# Altium PCB USB test.PcbDoc
Units mil, origin at the board's own origin, x right, y up, seen from the top; angles counter-clockwise.
Board outline 6000 x 4000 mil, 2 copper layers (Top Layer, Bottom Layer); 7 components, 8 nets, 37 pads, 5 vias.
Unrouted connection lines stored in the file: 2.
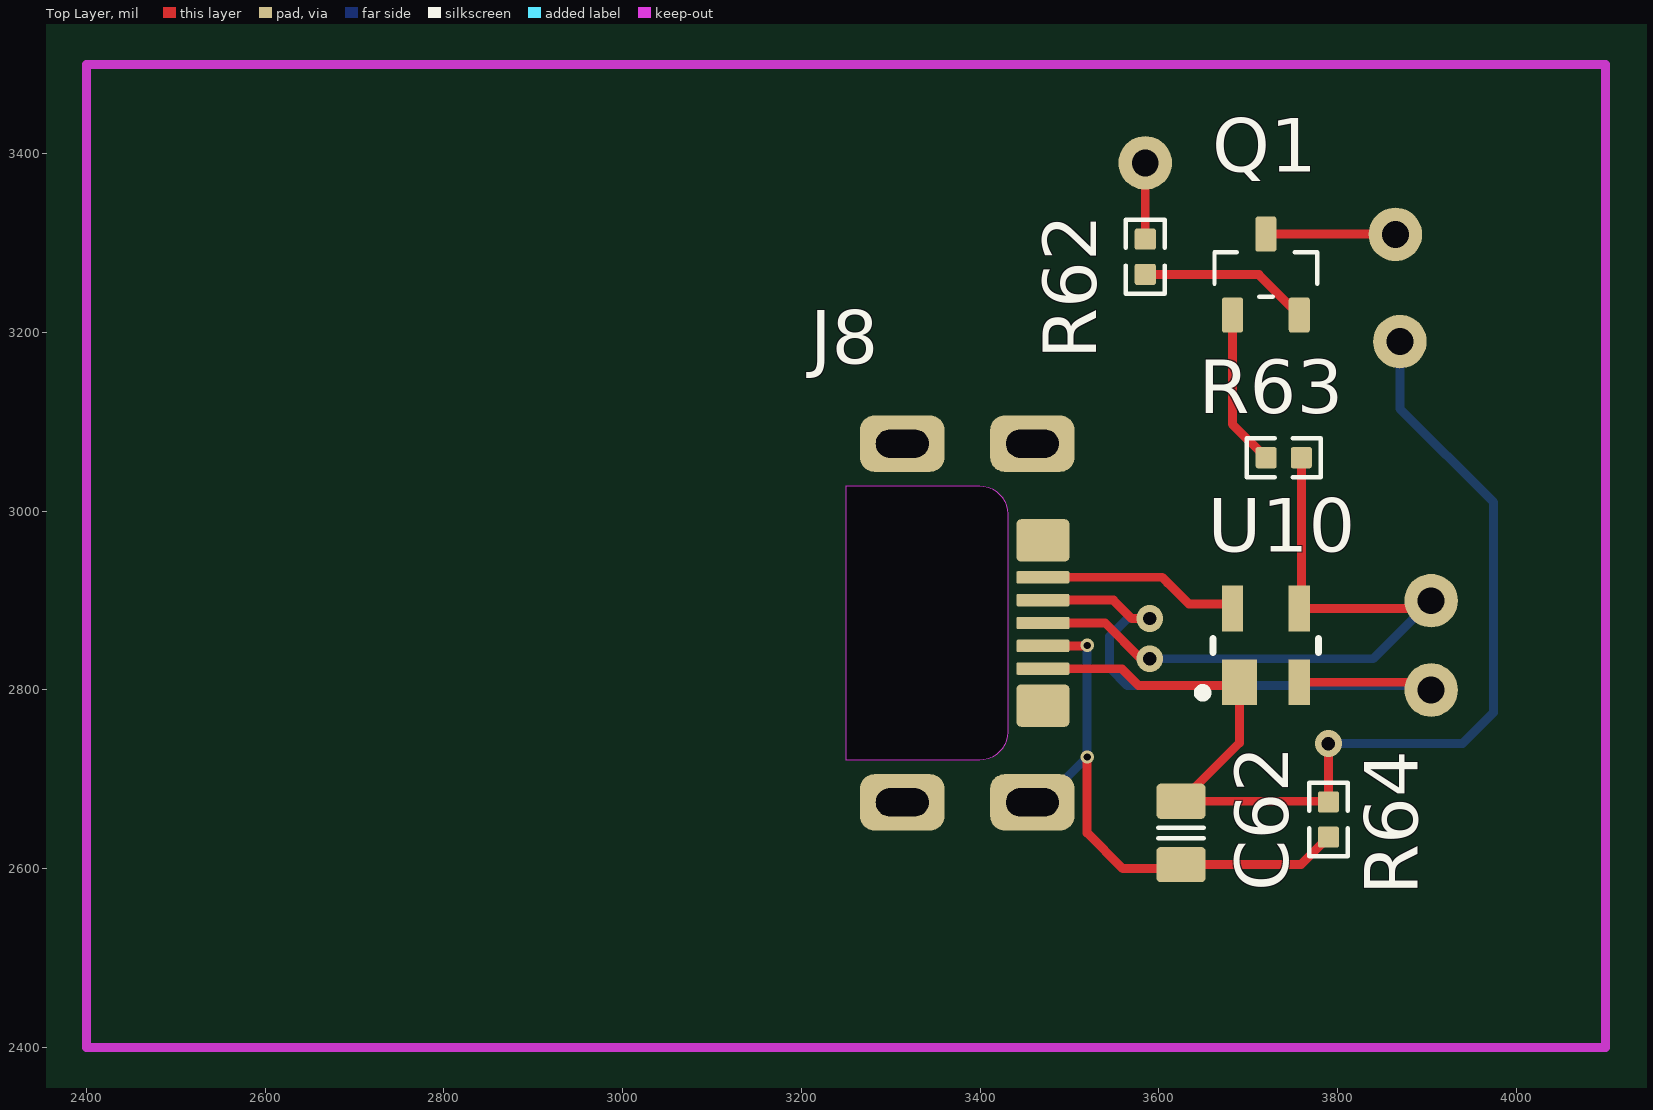
[diagram p0: Top Layer view]
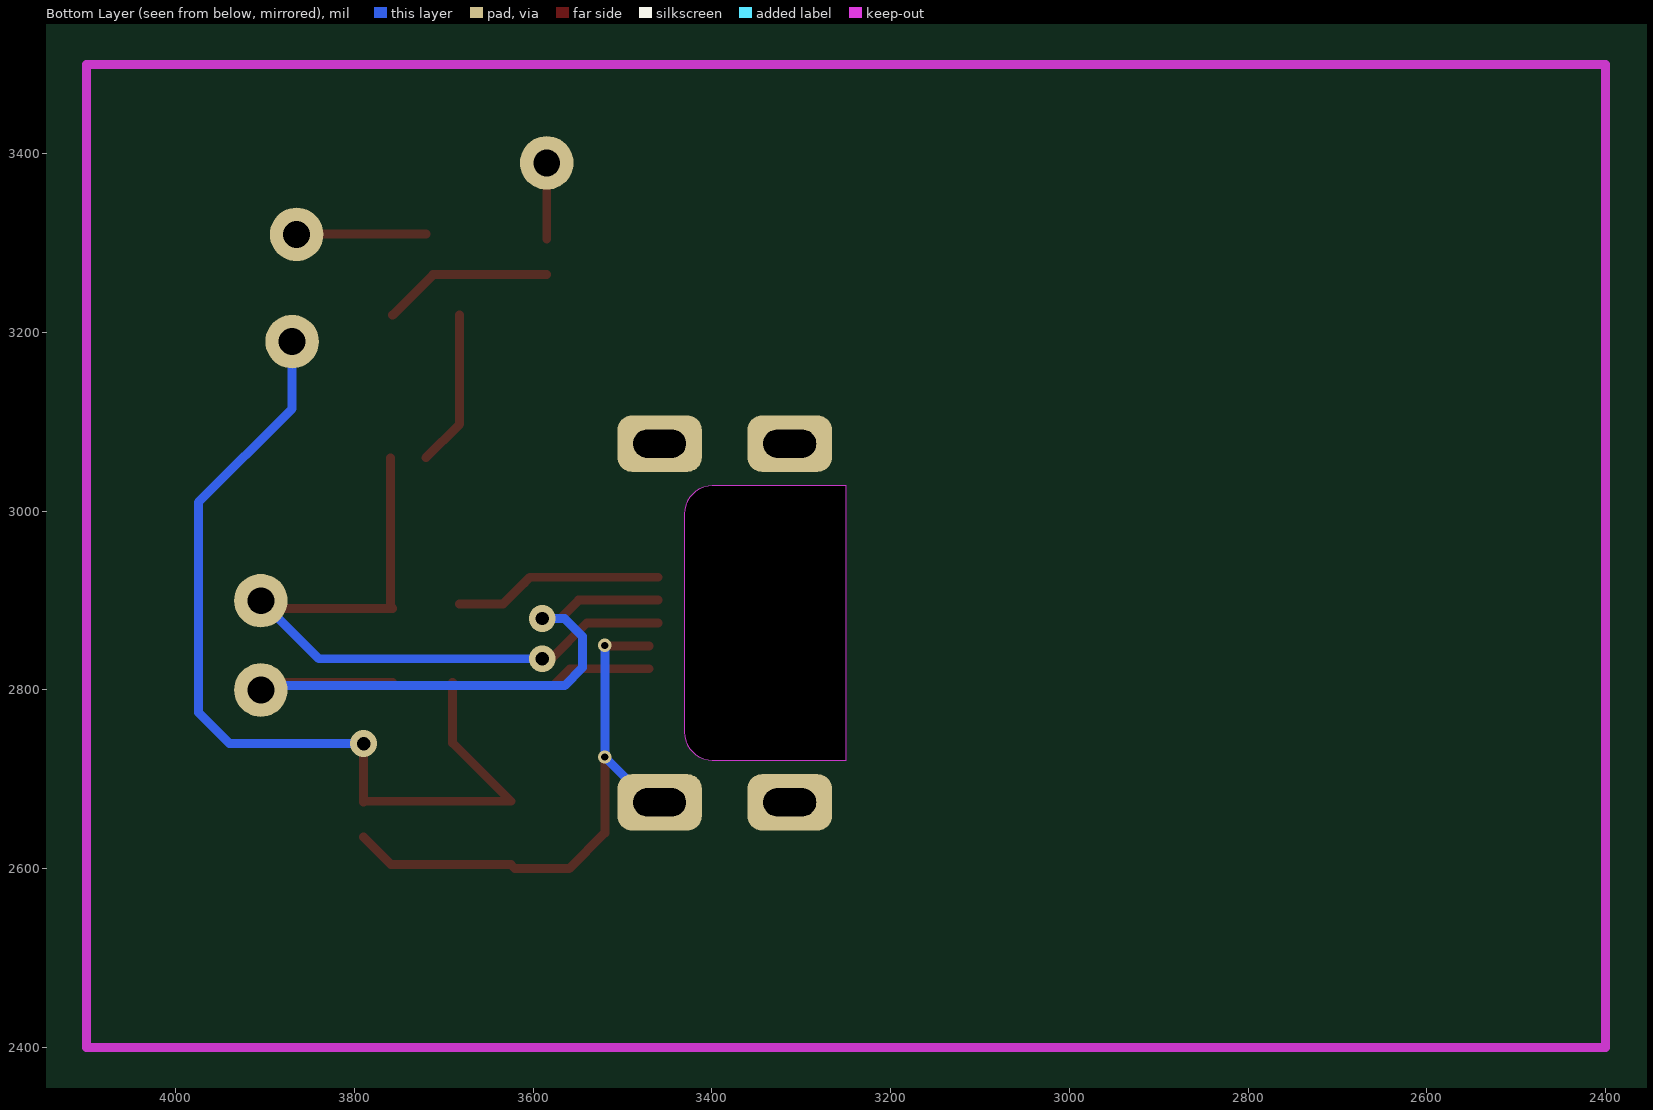
[diagram p1: Bottom Layer view, seen from below]
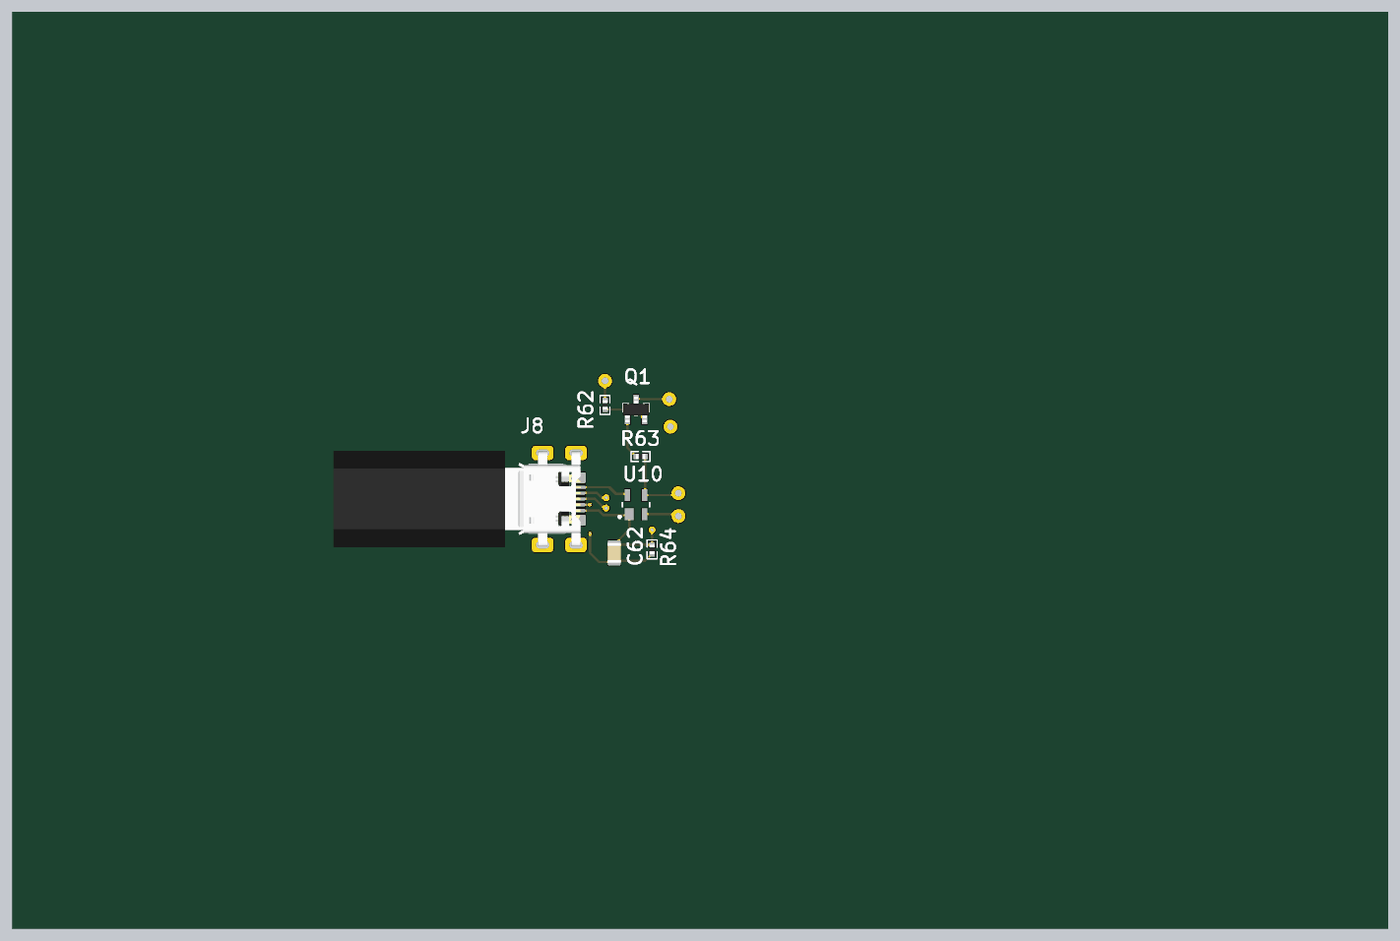
[diagram p2: 3D render of the assembled board from above, using the file's embedded part models]

## Layer stack, top to bottom
Top Layer: signal copper 1.4
Dielectric: dielectric 12.6, FR-4, Dk 4.8
Bottom Layer: signal copper 1.4

## Board outline
1000,1000 7000,1000 7000,5000 1000,5000

## Design rules (kind name [scope] priority, off if disabled: settings)
Clearance [All] p1: gap=10
PolygonConnect [All] p1: connectstyle=Relief reliefconductorwidth=10 reliefentries=4 polygonreliefangle="90 Angle"
RoutingVias [All] p1: holewidth=28 width=50 viastyle="Through Hole" minholewidth=28 minwidth=50 maxholewidth=28 maxwidth=50
SilkscreenOverComponentPads [All] p1: minsilkscreentomaskgap=10
SolderMaskExpansion [All] p1: expansion=4
Width [All] p1: maxlimit=10 minlimit=10 preferedwidth=10
27 further rules are at their usual default settings.

## Classes and differential pairs
component class "USB Device": C62 Q1 R62 R63 R64 U10

## Components (designator, comment, footprint, x,y, rotation, side; value= is the part's Value field where it differs from the comment)
C62 "approved sub OK" CAPC2012N 3625,2640 r90 top
J8 "USB Micro Type B" USB_Micro-B_FCI_SMD 3250,2875 r270 top
Q1 "PNP" SOT23_213 3720,3265 r90 top
R62 "Thick Film" RESC1005N 3585,3285 r90 top
R63 "Thick Film" RESC1005N 3740,3060 r0 top
R64 "Thick Film" RESC1005N 3790,2655 r270 top
U10 "PRTR5V0U2X" SOT-143-RC4_N 3720,2850 r90 top

## Footprints (in the part's own frame and the unit in brackets; to place one, negate y for a bottom-side part, rotate by r counter-clockwise, add the part's x,y. Pads: shape width x height; smd on the part's side, far side on the other; paste and mask are expansions set on the pad)
CAPC2012N [mm] "Chip Capacitor, Body 2.0x1.2mm, 0805, IPC Medium Density"
  round 0.254 on Mech14: 0(0,0)
  rrect25% 1x1.4 smd: 1(-0.9,0) 2(0.9,0)
  Top Layer pour cut-out: -0.4,0.8 0.4,0.8 0.4,-0.8 -0.4,-0.8
  silkscreen extent -0.15,-0.65 0.15,0.65, body extent -1.1,-0.72 1.1,0.73, height 1.34
RESC1005N [mm] "Chip Resistor, Body 1.0x0.5mm, EIA 0402, IPC Medium Density"
  round 0.2 on Mech14: 0(0,0)
  rrect20% 0.6x0.6 smd: 1(-0.5,0) 2(0.5,0)
  Top Layer pour cut-out: -0.2,0.35 0.2,0.35 0.2,-0.35 -0.2,-0.35
  silkscreen extent -1.05,-0.55 1.05,0.55, body extent -0.52,-0.27 0.53,0.28, height 0.4
SOT23_213 [mm]
  round 0.5 on Mech14: 0(0,0)
  rrect25% 1x0.6 smd: 1(-1.15,-0.95) 2(-1.15,0.95) 3(1.15,0)
  silkscreen extent -0.64,-1.46 0.64,1.46, body extent -1.4,-1.45 1.4,1.45, height 1.29
SOT-143-RC4_N [mm] "SOT143, 4-Leads, Body 2.9x1.3mm, Pitch 1.9mm, Lead Span 2.4mm, IPC Medium Density"
  rect 1.3x1 smd: 1(-1.05,0.75)
  rect 1.3x0.6 smd: 2(-1.05,-0.95) 3(1.05,-0.95) 4(1.05,0.95)
  silkscreen extent -1.47,-1.5 0.2,1.92, body extent -0.7,-1.52 0.7,1.52, height 1.22
USB_Micro-B_FCI_SMD [mm]
  round 0.508 on Mech14: 0(0,0)
  rrect20% 0.35x1.5 smd: 1(-1.3,5.6) 2(-0.65,5.6) 3(0,5.6) 4(0.65,5.6) 5(1.3,5.6)
  rrect50% 1.6x2.4 hole 0.8 slot 1.5 at 90 deg: SH(-5.1,5.3) SH(-5.1,1.6) SH(5.1,5.3) SH(5.1,1.6)
  rrect20% 1.2x1.5 smd: SH(-2.35,5.6) SH(2.35,5.6)
  Keep-Out Layer board cut-out: -3.9,0 -3.9,3.797 -3.839,4.103 -3.666,4.362 -3.406,4.536 -3.1,4.597 -3.1,4.597 3.1,4.597 3.406,4.536 3.666,4.362 3.839,4.103 3.9,3.797 3.9,3.797 3.9,0
  body extent -5.35,-21.58 5.35,5.8, height 4.67

## Part data
C62: library part CAPC_100n_0805, "Capacitor SMD Cer 100nF 10% 50V X7R 0805"
J8: library part USB_Micro_TypeB_FCI, "Connector SMD-THD USB Micro Type B middle mount"
Q1: library part PNP_NSS60600MZ4T1G, "Transistor SMD PNP 60V 6A 800mW SOT-223"
R62 R63 R64: library part RES_330R_0402_5%, "Resistor SMD chip 330 Ohm 0.063W 5% 0402"

## Free pads (board coordinates)
  round 60 hole 30: 0(3585,3390) 0(3905,2800) 1(3865,3310) 1(3870,3190) 1(3905,2900)

## Via types
v1: diameter 30, hole 15, Top Layer to Bottom Layer, 3 vias
v2: diameter 15, hole 8, Top Layer to Bottom Layer, 2 vias

## Nets (pads, with @x,y where several pads share a name; then routed paths per layer and width w, separated by ;. In a path a pad name is that pad's centre, name@x,y a point inside that pad or via, vN(x,y) a via of type N, cw(c..) or ccw(c..) an arc to the next point about the centre after c; other vN are vias at no path point)
GND: C62.2 J8.5 pad.1@3870,3190 R64.1 U10.1 | length 1278.3
  Top Layer w10: J8.5 3558.75,2823.82 3577.57,2805 3686.81,2805 U10.1 3690.47,2740.91 C62.2 3789.25,2675.43 R64.1 v1(3790,2740)
  Bottom Layer w10: v1(3790,2740) 3940,2740 3975,2775 3975,3010 3870,3115 pad.1@3870,3190
NetC62_1: C62.1 J8.4 J8.SH R64.2 | length 653.9
  Top Layer w10: J8.SH@3458.66,2674.21 J8.SH@3469.21,2674.21 ; J8.4 3519.41,2849.41 v2(3520,2850) ; v2(3520,2725) 3520,2640 3560,2600 3620.43,2600 C62.1 3759.25,2604.57 R64.2
  Bottom Layer w10: J8.SH@3458.66,2674.21 3469.21,2674.21 v2(3520,2725) v2(3520,2850)
NetQ1_1: Q1.1 R62.1 | length 191.3
  Top Layer w10: R62.1 3694.68,3265.32 3695,3265 3712.13,3265 Q1.1
NetQ1_2: Q1.2 R63.1 | length 175.3
  Top Layer w10: Q1.2 3682.6,3097.72 R63.1
USB-CONNECT_RXD2: pad.0@3585,3390 R62.2 | length 85.3
  Top Layer w10: R62.2 pad.0@3585,3390
USB-D+: J8.3 pad.1@3905,2900 R63.2 U10.3 | length 796.6
  Top Layer w10: J8.3@3460.47,2875 3540,2875 3580,2835 v1(3590,2835) ; R63.2 3759.68,2893.62 U10.3 pad.1@3896.34,2891.34
  Bottom Layer w10: v1(3590,2835) 3840,2835 pad.1@3905,2900
USB-D-: J8.2 pad.0@3905,2800 U10.2 | length 735.6
  Top Layer w10: J8.2@3460.47,2900.59 3549.41,2900.59 3570,2880 v1(3590,2880) ; U10.2 pad.0@3896.34,2808.66
  Bottom Layer w10: v1(3590,2880) 3565,2880 3545,2860 3545,2825 3565,2805 3900,2805 pad.0@3905,2800
VIO_3V3X: pad.1@3865,3310 Q1.3 | length 145.1
  Top Layer w10: Q1.3 3864.72,3310.28 pad.1@3865,3310
pads on no net: C62.0 J8.0 J8.1 Q1.0 R62.0 R63.0 R64.0 U10.4
copper on no net: | length 234.5
  Top Layer w10: 3460.47,2926.18 3603.82,2926.18 3610,2920 3633.66,2896.34 3682.6,2896.34

## Keep-outs
Keep-Out Layer:
  lines w10: 2400,2400 4100,2400 4100,3500 2400,3500 2400,2400